# Altium PCB MASTER.PcbDoc
Units mm, origin at the board's own origin, x right, y up, seen from the top; angles counter-clockwise.
Board outline 91.49 x 74.39 mm, 2 copper layers (Top Layer, Bottom Layer); 49 components, 39 nets, 255 pads, 49 vias.
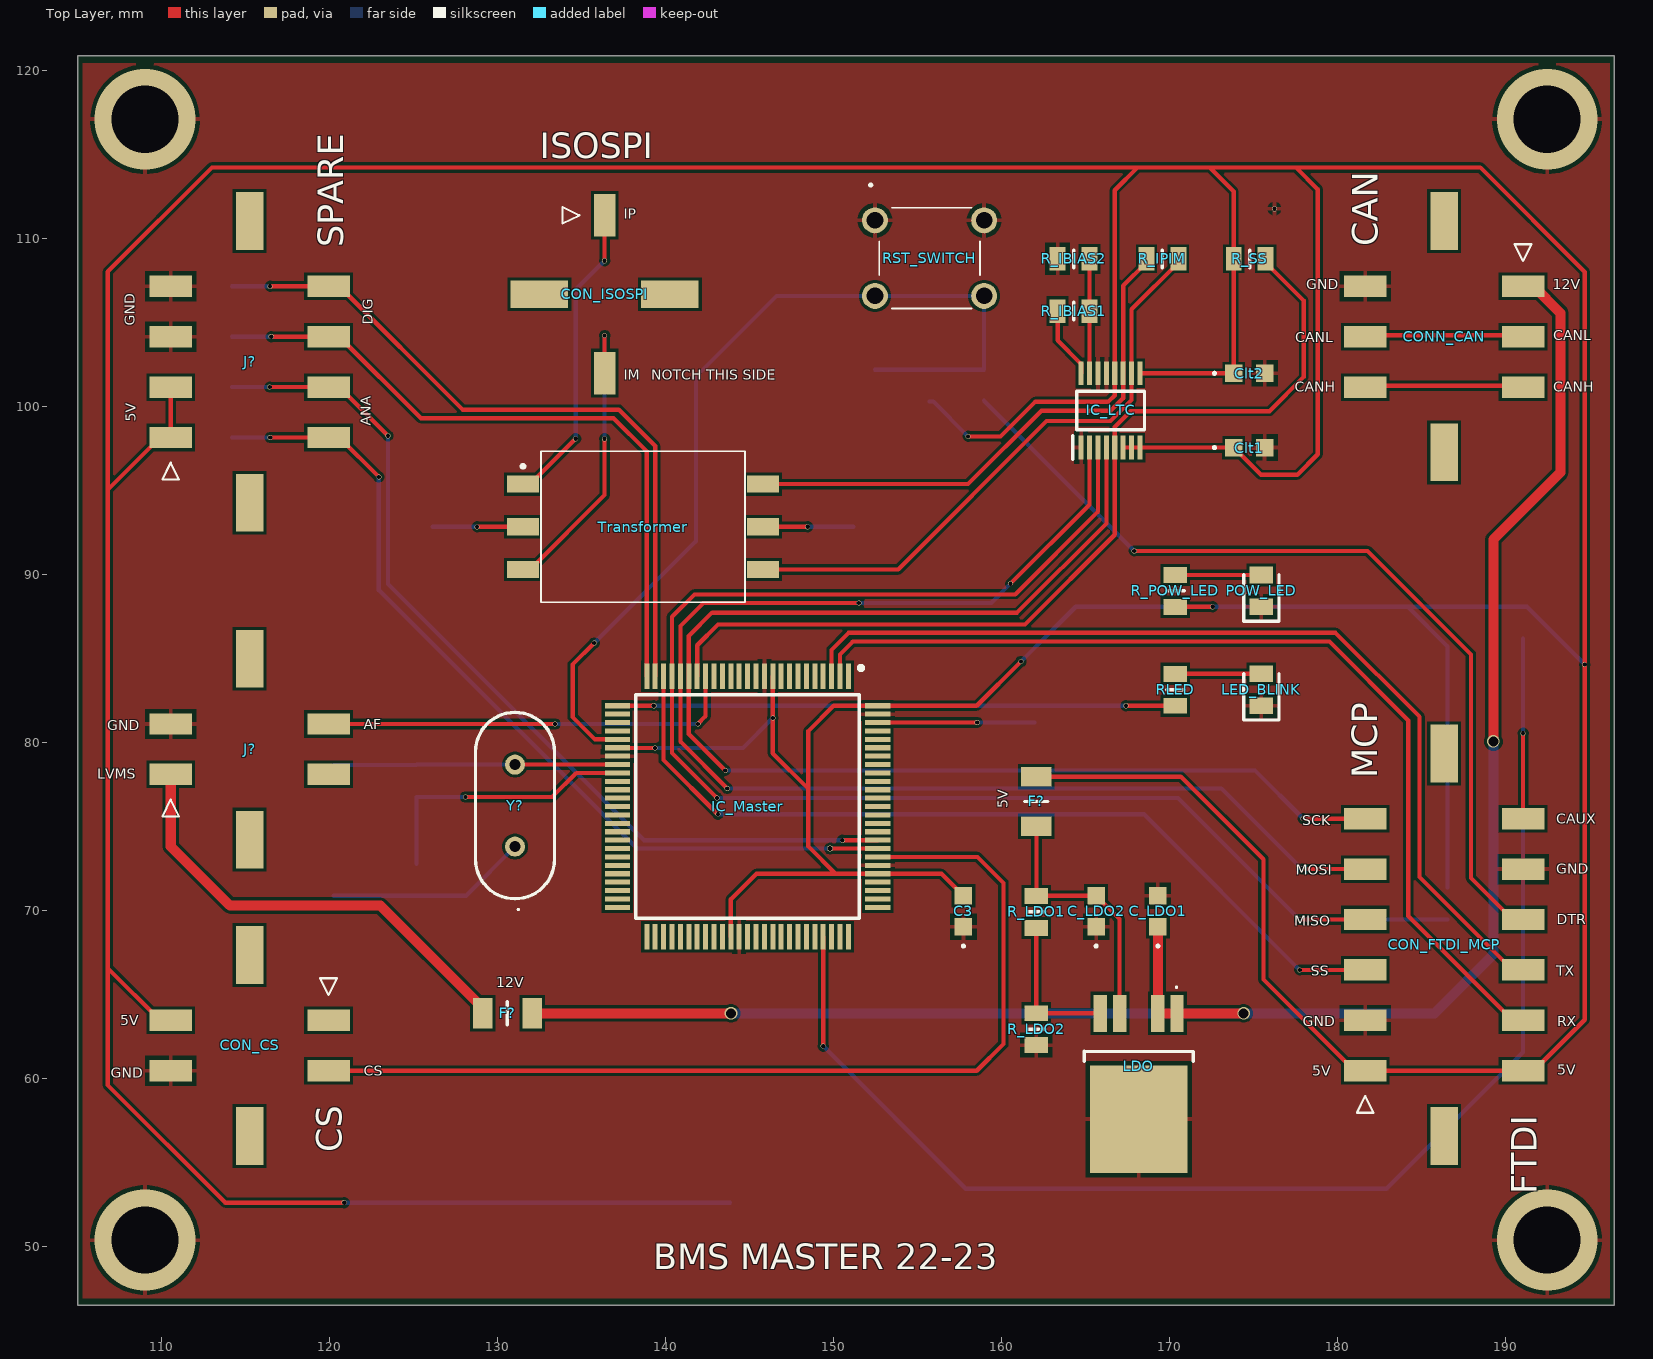
[diagram p0: Top Layer view]
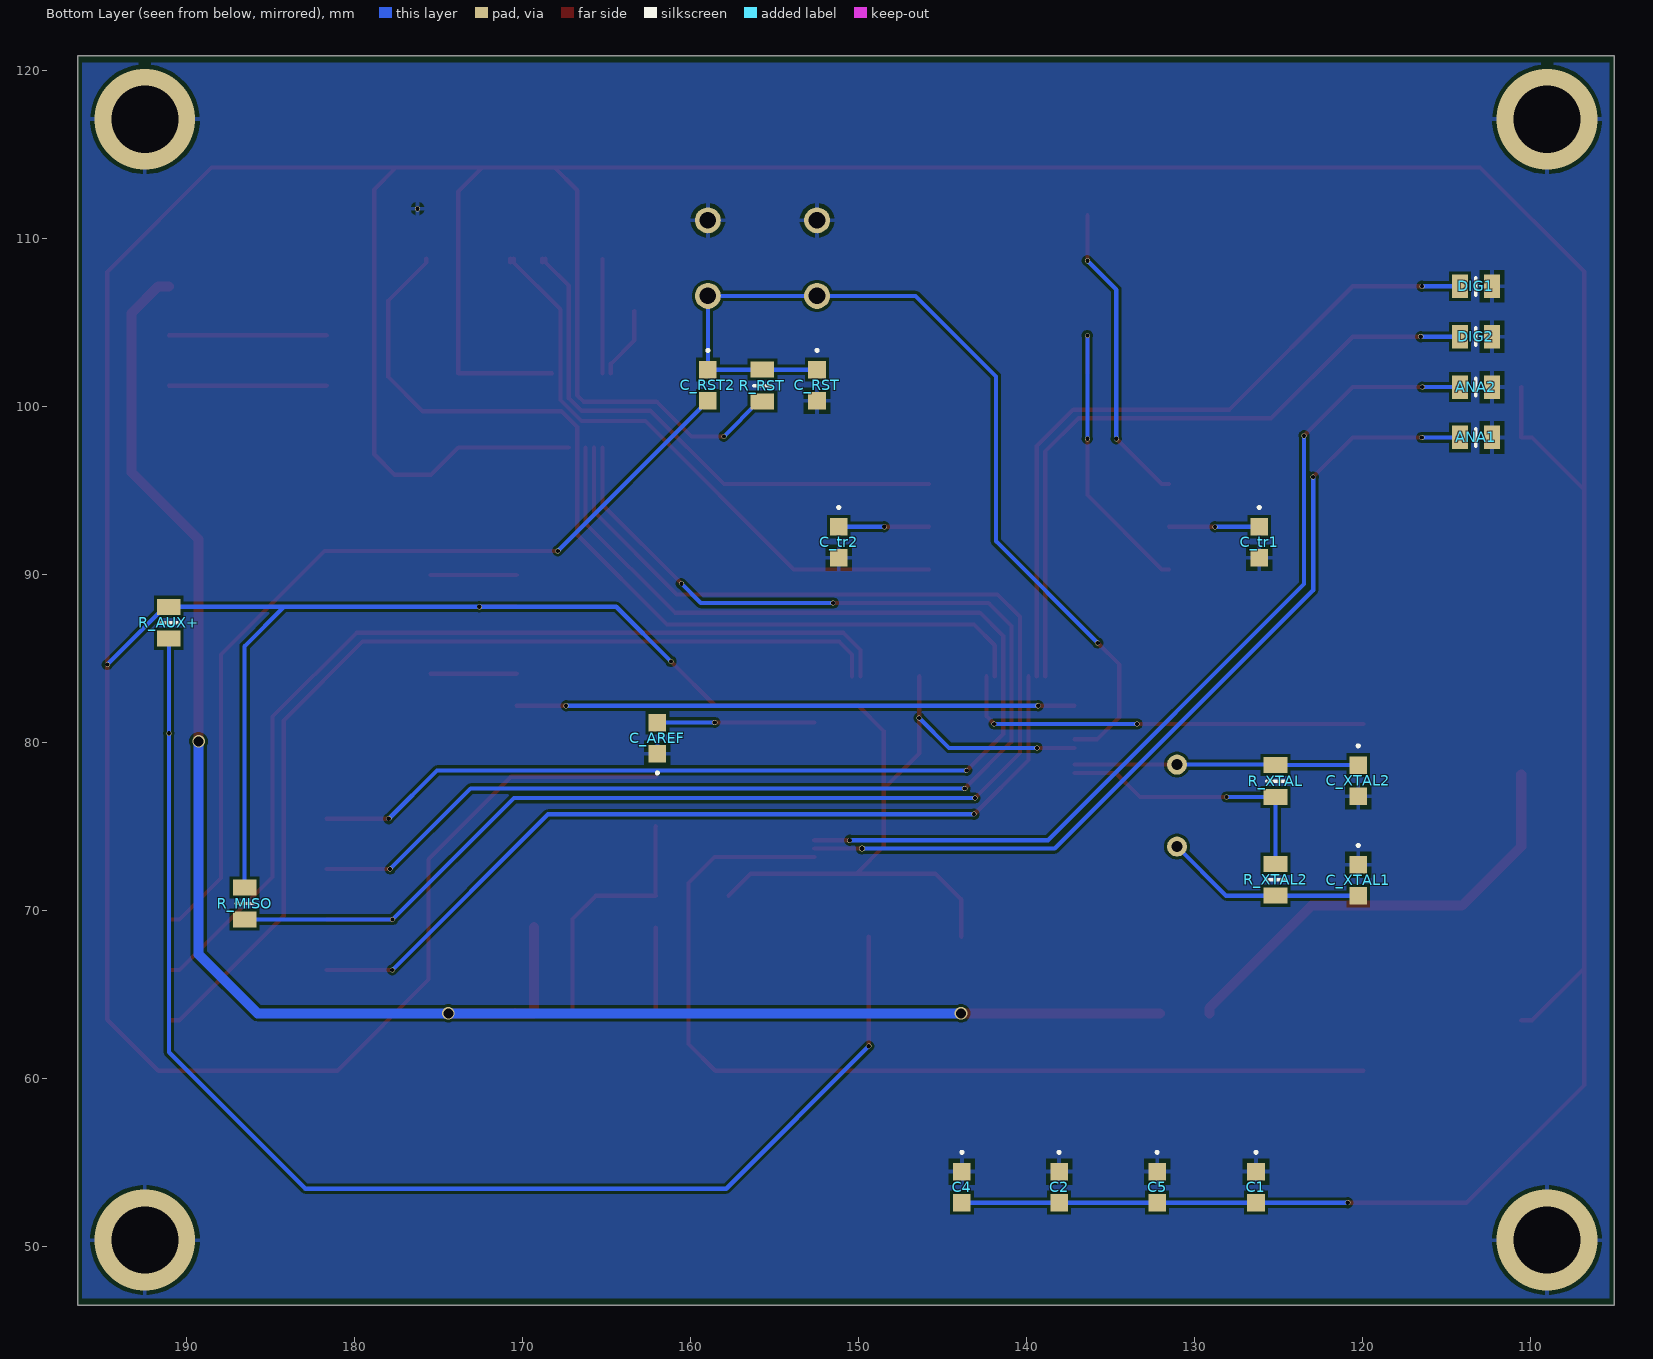
[diagram p1: Bottom Layer view, seen from below]
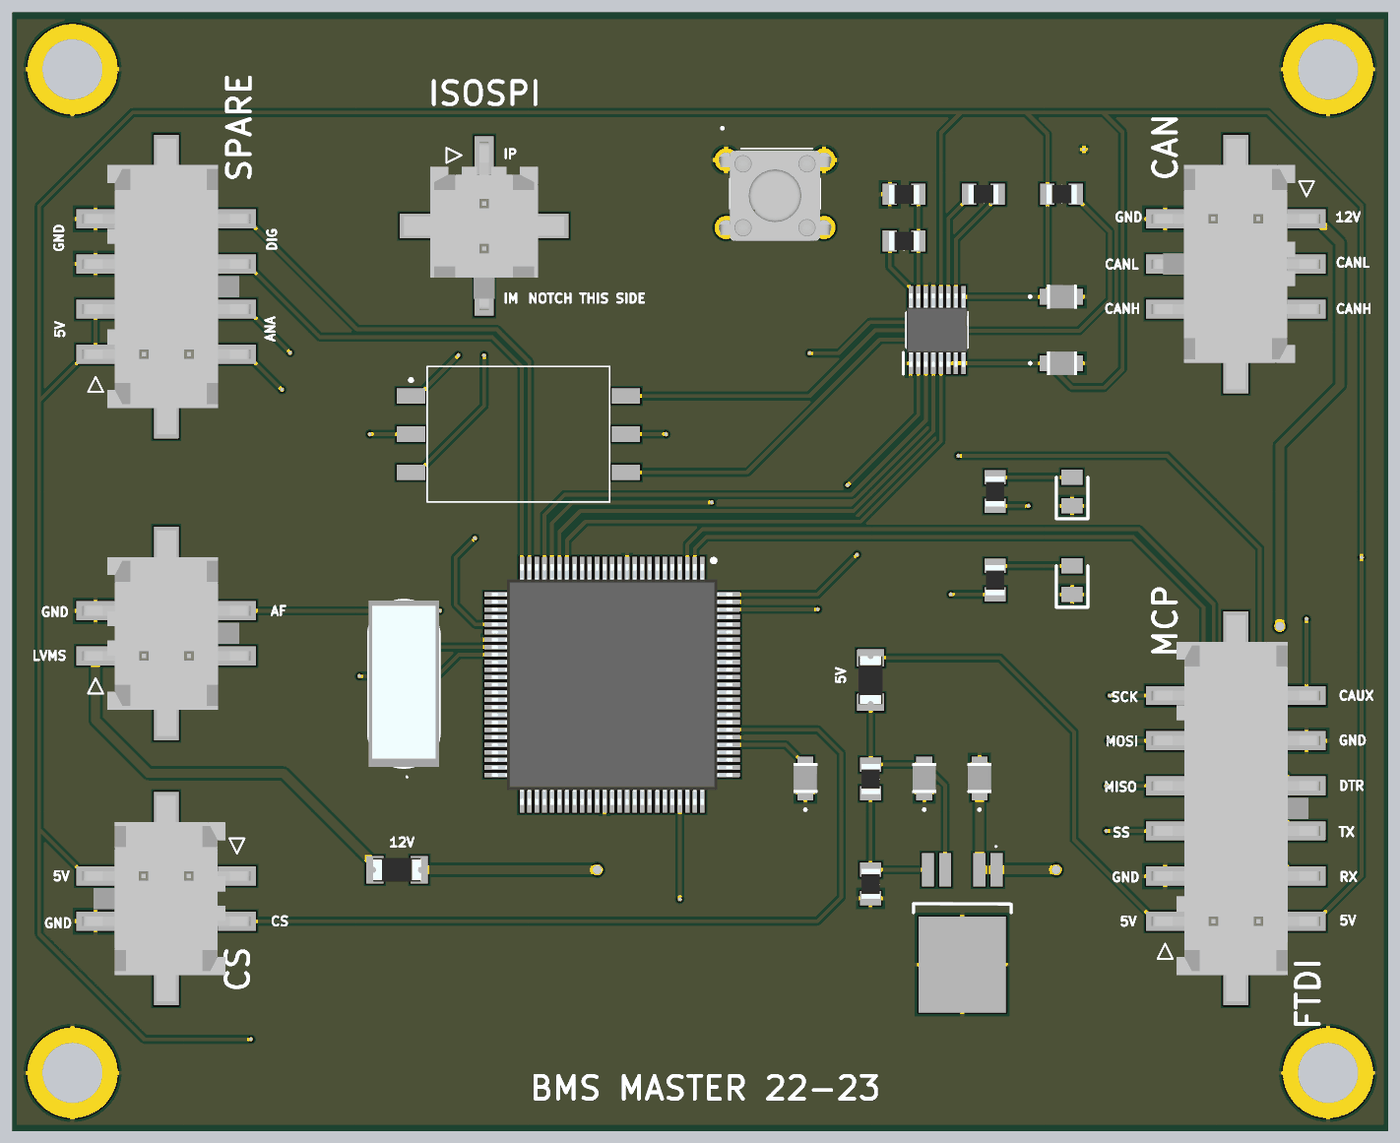
[diagram p2: 3D render of the assembled board from above, using the file's embedded part models]
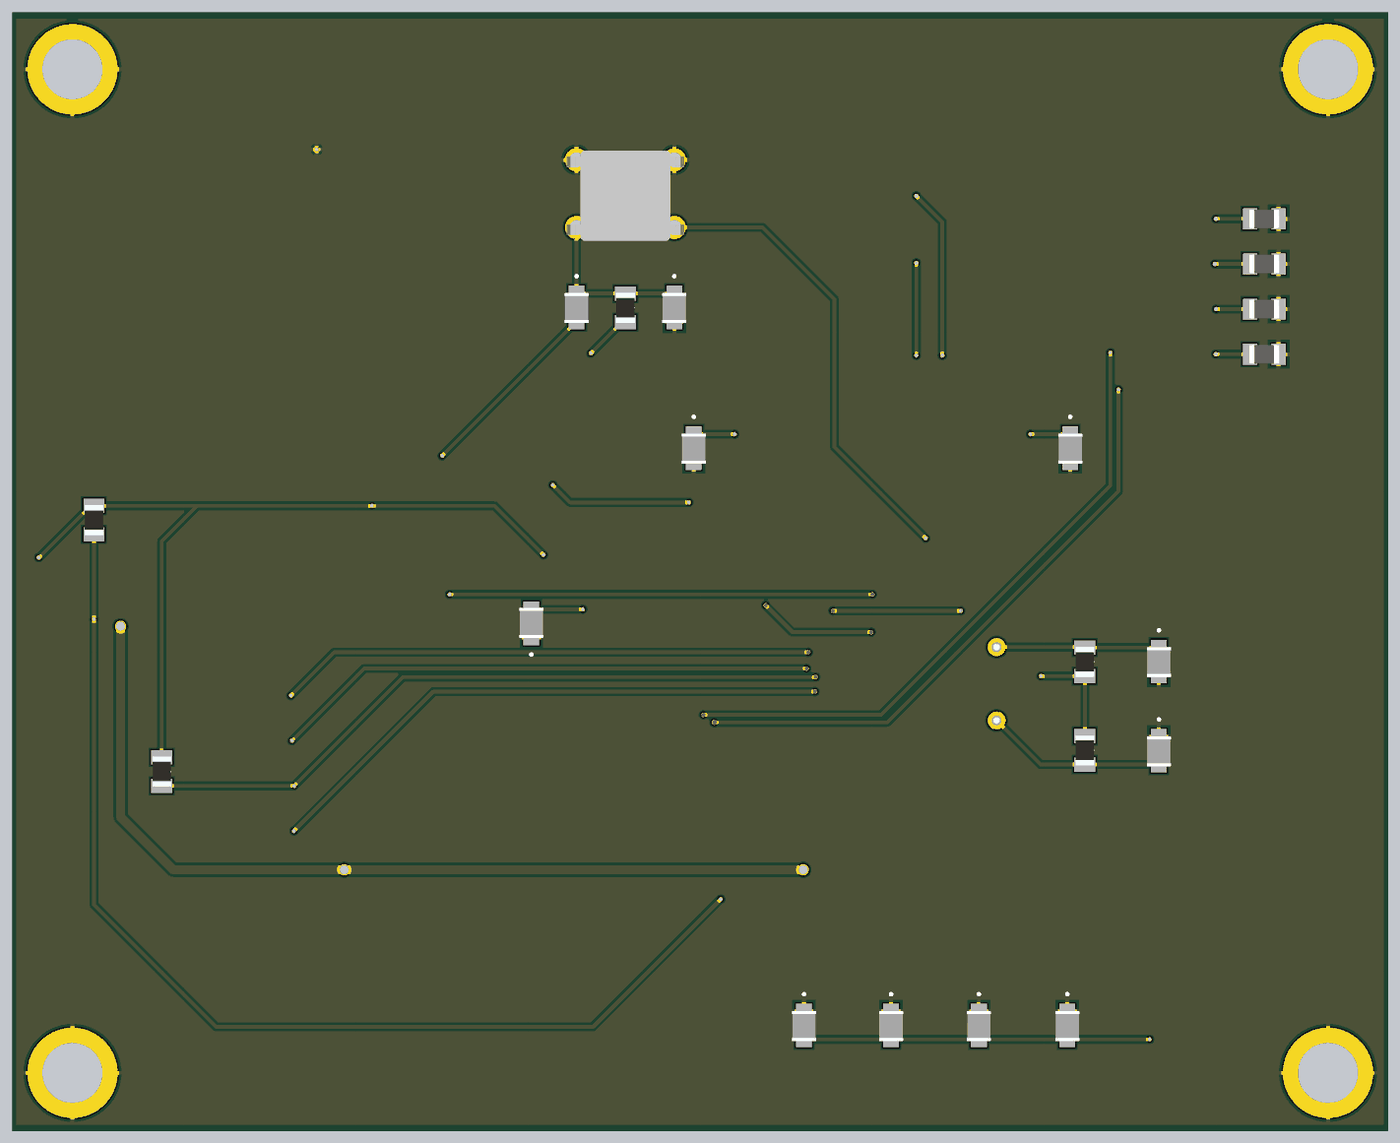
[diagram p3: 3D render of the assembled board from below, using the file's embedded part models]

## Layer stack, top to bottom
Top Solder: solder mask 0.0102, Solder Resist, Dk 3.5
Top Layer: signal copper 0.0356
Dielectric 1: dielectric 0.32, FR-4, Dk 4.8
Bottom Layer: signal copper 0.0356
Bottom Solder: solder mask 0.0102, Solder Resist, Dk 3.5

## Board outline
105.025,46.496 196.51,46.496 196.51,120.887 105.025,120.887

## Design rules (kind name [scope] priority, off if disabled: settings)
Clearance [All] p1: gap=0.17 ignorepadtopadclearanceinfootprint=FALSE
PolygonConnect [All] p1: connectstyle=Relief reliefconductorwidth=0.254 reliefentries=4 polygonreliefangle="90 Angle" airgapwidth=0.254
RoutingVias [All] p1: holewidth=0.25 width=0.3 viastyle="Through Hole" minholewidth=0.25 minwidth=0.3 maxholewidth=0.25 maxwidth=0.3
SolderMaskExpansion [All] p1: expansion=0.102 istentingtop=FALSE
Width [All] p1: maxlimit=0.6 minlimit=0.25 preferedwidth=0.25 minimp=50.000000 maximp=50.000000 favimp=50.000000
30 further rules are at their usual default settings.

## Components (designator, comment, footprint, x,y, rotation, side; value= is the part's Value field where it differs from the comment)
ANA1 "10K" RESC2012X60N 113.269,98.153 r0 bottom
ANA2 "10K" RESC2012X60N 113.269,101.153 r0 bottom
C1 "0.1uF" C2012_Commercial 126.362,53.528 r270 bottom
C2 "0.1uF" C2012_Commercial 138.082,53.528 r270 bottom
C3 "0.1uF" C2012_Commercial 157.757,69.949 r90 top
C4 "0.1uF" C2012_Commercial 143.869,53.528 r270 bottom
C5 "0.1uF" C2012_Commercial 132.244,53.528 r270 bottom
C_AREF "10nF" C2012_Commercial 161.996,80.257 r90 bottom
C_LDO1 "10nF" C2012_Commercial 169.331,69.949 r90 top
C_LDO2 "10nF" C2012_Commercial 165.66,69.949 r90 top
C_RST "22pF" C2012_Commercial 152.49,101.265 r270 bottom
C_RST2 "10uF" C2012_Commercial 158.99,101.265 r270 bottom
C_tr1 "0.01uF" C2012_Commercial 126.168,91.916 r270 bottom
C_tr2 "0.01uF" C2012_Commercial 151.199,91.916 r270 bottom
C_XTAL1 "22pF" C2012_Commercial 120.275,71.795 r270 bottom
C_XTAL2 "22pF" C2012_Commercial 120.275,77.725 r270 bottom
Clt1 "0.01uF" C2012_Commercial 174.775,97.552 r0 top
Clt2 "0.01uF" C2012_Commercial 174.775,101.976 r0 top
CON_CS "43045-0419" 43045-04YY_181920 115.269,61.959 r90 top
CON_FTDI_MCP "43045-1219" 43045-12YY_181920 186.376,67.959 r270 top
CON_ISOSPI "43045-0218" 43045-02YY_181920 136.398,106.681 r180 top
CONN_CAN "43045-0619" 43045-06YY_181920 186.376,104.153 r90 top
DIG1 "10K" RESC2012X60N 113.269,107.153 r0 bottom
DIG2 "10K" RESC2012X60N 113.269,104.153 r0 bottom
F? "NANOSMDC020F-2" NANOSMDC016F2 162.095,76.487 r90 top
F? "NANOSMDC020F-2" NANOSMDC016F2 130.61,63.876 r180 top
IC_LTC "LTC6820IMS#PBF" SOP50P490X110-16N 166.517,99.764 r90 top
IC_Master "ATMEGA2560-16AU" QFP50P1600X1600X120-100N 144.91,76.184 r270 top
J? "43045-0819" 43045-08YY_181920 115.269,102.653 r270 top
J? "43045-0419" 43045-04YY_181920 115.269,79.597 r270 top
LDO "TLF1963TEATMA1" TLF1963TEATMA1 168.191,59.626 r180 top
LED_BLINK "SML-LXT0805IW-TR" LEDC2012X80N 175.49,83.134 r90 top
POW_LED "SML-LXT0805IW-TR" LEDC2012X80N 175.49,89.024 r90 top
R_AUX+ "10k" RESC2012X60N 191.076,87.124 r90 bottom
R_IBIAS1 "2.8K" RESC2012X60N 164.317,105.682 r0 top
R_IBIAS2 "1.2K" RESC2012X60N 164.317,108.782 r0 top
R_IPIM "120" RESC2012X60N 169.6,108.792 r0 top
R_LDO1 "3.3K" RESC2012X60N 162.095,69.913 r90 top
R_LDO2 "10K" RESC2012X60N 162.095,62.928 r90 top
R_MISO "2K" RESC2012X60N 186.568,70.409 r90 bottom
R_POW_LED "1K" RESC2012X60N 170.373,89.024 r90 top
R_RST "10k" RESC2012X60N 155.74,101.241 r270 bottom
R_SS "10K" RESC2012X60N 174.8,108.792 r180 top
R_XTAL "1M" RESC2012X60N 125.2,77.7 r270 bottom
R_XTAL2 "27" RESC2012X60N 125.2,71.825 r90 bottom
RLED "1K" RESC2012X60N 170.373,83.134 r90 top
RST_SWITCH "1825910-3" 18259103 152.49,111.08 r90 top
Transformer "HM2113ZNL" HM2113ZNL 138.684,92.837 r270 top
Y? "LFXTAL003169" LFXTAL003169 131.064,73.801 r90 top

## Footprints (in the part's own frame and the unit in brackets; to place one, negate y for a bottom-side part, rotate by r counter-clockwise, add the part's x,y. Pads: shape width x height; smd on the part's side, far side on the other; paste and mask are expansions set on the pad)
43045-02YY_181920 [mm]
  rect 1.27x2.54 smd: 1(0,-4.7) 2(0,4.7)
  rect 3.43x1.65 smd: 3(3.885,0) 4(-3.885,0)
  silkscreen extent 1.5,-5.2 2.5,-4.2, body extent -5.33,-5.6 5.33,5.6, height 9.96
43045-04YY_181920 [mm]
  rect 1.27x2.54 smd: 1(1.5,-4.7) 2(-1.5,-4.7) 3(1.5,4.7) 4(-1.5,4.7)
  rect 3.43x1.65 smd: 5(5.385,0) 6(-5.385,0)
  silkscreen extent 3,-5.2 4,-4.2, body extent -6.83,-5.6 6.83,5.6, height 9.96
43045-06YY_181920 [mm]
  rect 1.27x2.54 smd: 1(3,-4.7) 2(0,-4.7) 3(-3,-4.7) 4(3,4.7) 5(0,4.7) 6(-3,4.7)
  rect 3.43x1.65 smd: 7(6.885,0) 8(-6.885,0)
  silkscreen extent 4.5,-5.2 5.5,-4.2, body extent -8.32,-5.6 8.32,5.6, height 9.96
43045-08YY_181920 [mm]
  rect 1.27x2.54 smd: 1(4.5,-4.7) 2(1.5,-4.7) 3(-1.5,-4.7) 4(-4.5,-4.7) 5(4.5,4.7) 6(1.5,4.7) 7(-1.5,4.7) 8(-4.5,4.7)
  rect 3.43x1.65 smd: 9(8.385,0) 10(-8.385,0)
  silkscreen extent 6,-5.2 7,-4.2, body extent -9.82,-5.6 9.82,5.6, height 9.96
43045-12YY_181920 [mm]
  rect 1.27x2.54 smd: 1(7.5,-4.7) 2(4.5,-4.7) 3(1.5,-4.7) 4(-1.5,-4.7) 5(-4.5,-4.7) 6(-7.5,-4.7) 7(7.5,4.7) 8(4.5,4.7) 9(1.5,4.7) 10(-1.5,4.7) 11(-4.5,4.7) 12(-7.5,4.7)
  rect 3.43x1.65 smd: 13(11.385,0) 14(-11.385,0)
  silkscreen extent 9,-5.2 10,-4.2, body extent -12.83,-5.6 12.83,5.6, height 9.95
18259103 [mm]
  round 1.54 hole 0.99: 1(0,0) 2(0,-6.5) 3(-4.5,0) 4(-4.5,-6.5)
  silkscreen extent -5.25,-6.25 2.15,0.3, body extent -5.39,-7.15 0.61,0.65, height 3.32
C2012_Commercial [mm]
  rect 1.05x1.05 smd: 1(-0.925,0) 2(0.925,0)
  silkscreen extent -2.12,-0.05 -2.03,0.05, body extent -0.96,-0.8 1.04,0.8, height 1.25
HM2113ZNL [mm]
  rect 1.02x1.89 smd: 1(-2.54,-7.145) 2(0,-7.145) 3(2.54,-7.145) 4(2.54,7.145) 5(0,7.145) 6(-2.54,7.145)
  silkscreen extent -4.5,-7.24 4.5,6.08
LEDC2012X80N [mm]
  rect 1x1.4 smd: 1(-0.95,0) 2(0.95,0)
  silkscreen extent -1.8,-1.05 0.95,1.05
LFXTAL003169 [mm]
  round 1.192 hole 0.65: 1(0,0) 2(4.88,0)
  silkscreen extent -3.8,-2.35 7.99,2.35, body extent -3.09,-2.35 7.97,2.35, height 4.1
NANOSMDC016F2 [mm]
  rect 1.16x1.81 smd: 1(-1.475,0) 2(1.475,0)
  silkscreen extent 0,-0.69 0,0.69, body extent -1.6,-0.79 1.6,0.79, height 0.82
QFP50P1600X1600X120-100N [mm]
  rect 1.5x0.3 smd: 1(-7.75,6) 2(-7.75,5.5) 3(-7.75,5) 4(-7.75,4.5) 5(-7.75,4) 6(-7.75,3.5) 7(-7.75,3) 8(-7.75,2.5) 9(-7.75,2) 10(-7.75,1.5) 11(-7.75,1) 12(-7.75,0.5) 13(-7.75,0) 14(-7.75,-0.5) 15(-7.75,-1) 16(-7.75,-1.5) 17(-7.75,-2) 18(-7.75,-2.5) 19(-7.75,-3) 20(-7.75,-3.5) 21(-7.75,-4) 22(-7.75,-4.5) 23(-7.75,-5) 24(-7.75,-5.5) 25(-7.75,-6) 51(7.75,-6) 52(7.75,-5.5) 53(7.75,-5) 54(7.75,-4.5) 55(7.75,-4) 56(7.75,-3.5) 57(7.75,-3) 58(7.75,-2.5) 59(7.75,-2) 60(7.75,-1.5) 61(7.75,-1) 62(7.75,-0.5) 63(7.75,0) 64(7.75,0.5) 65(7.75,1) 66(7.75,1.5) 67(7.75,2) 68(7.75,2.5) 69(7.75,3) 70(7.75,3.5) 71(7.75,4) 72(7.75,4.5) 73(7.75,5) 74(7.75,5.5) 75(7.75,6)
  rect 0.3x1.5 smd: 26(-6,-7.75) 27(-5.5,-7.75) 28(-5,-7.75) 29(-4.5,-7.75) 30(-4,-7.75) 31(-3.5,-7.75) 32(-3,-7.75) 33(-2.5,-7.75) 34(-2,-7.75) 35(-1.5,-7.75) 36(-1,-7.75) 37(-0.5,-7.75) 38(0,-7.75) 39(0.5,-7.75) 40(1,-7.75) 41(1.5,-7.75) 42(2,-7.75) 43(2.5,-7.75) 44(3,-7.75) 45(3.5,-7.75) 46(4,-7.75) 47(4.5,-7.75) 48(5,-7.75) 49(5.5,-7.75) 50(6,-7.75) 76(6,7.75) 77(5.5,7.75) 78(5,7.75) 79(4.5,7.75) 80(4,7.75) 81(3.5,7.75) 82(3,7.75) 83(2.5,7.75) 84(2,7.75) 85(1.5,7.75) 86(1,7.75) 87(0.5,7.75) 88(0,7.75) 89(-0.5,7.75) 90(-1,7.75) 91(-1.5,7.75) 92(-2,7.75) 93(-2.5,7.75) 94(-3,7.75) 95(-3.5,7.75) 96(-4,7.75) 97(-4.5,7.75) 98(-5,7.75) 99(-5.5,7.75) 100(-6,7.75)
  silkscreen extent -8.37,-6.65 6.65,6.88, body extent -8,-8 8,8, height 1.2
RESC2012X60N [mm]
  rect 0.95x1.4 smd: 1(-0.95,0) 2(0.95,0)
  silkscreen extent 0,-0.53 0,0.53, body extent -1,-0.63 1,0.63, height 0.6
SOP50P490X110-16N [mm]
  rect 1.425x0.3 smd: 1(-2.212,1.75) 2(-2.212,1.25) 3(-2.212,0.75) 4(-2.212,0.25) 5(-2.212,-0.25) 6(-2.212,-0.75) 7(-2.212,-1.25) 8(-2.212,-1.75) 9(2.212,-1.75) 10(2.212,-1.25) 11(2.212,-0.75) 12(2.212,-0.25) 13(2.212,0.25) 14(2.212,0.75) 15(2.212,1.25) 16(2.212,1.75)
  silkscreen extent -2.93,-2.02 1.15,2.25, body extent -2.45,-2.02 2.45,2.02, height 1.1
TLF1963TEATMA1 [mm]
  rect 0.8x2.2 smd: 1(-2.28,-4.25) 2(-1.14,-4.25) 4(1.14,-4.25) 5(2.28,-4.25)
  rect 5.8x6.4 smd: 3(0,2.05)
  silkscreen extent -3.25,-5.85 3.25,-1.4

## Part data
ANA1 ANA2 DIG1 DIG2: library part RC0805JR-0710KL, "Resistor", Manufacturer_Name=YAGEO, Mouser Part Number=603-RC0805JR-0710KL, Arrow Part Number=RC0805JR-0710KL, Arrow Price/Stock=https://www.arrow.com/en/products/rc0805jr-0710kl/yageo?region=nac, Datasheet Link=https://componentsearchengine.com/Datasheets/2/RC0805JR-0710KL.pdf, Height=0.6mm, Manufacturer_Part_Number=RC0805JR-0710KL, Mouser Price/Stock=https://www.mouser.co.uk/ProductDetail/YAGEO/RC0805JR-0710KL?qs=ZFGQJeMQzF5q%2Fp77vM%2FrVQ%3D%3D
C1 C2 C3 C4 C5 C_AREF C_LDO1 C_LDO2 C_RST C_RST2 C_tr1 C_tr2 C_XTAL1 C_XTAL2 Clt1 Clt2: library part C2012C0G1E333J125AA, "Capacitor", Manufacturer_Name=TDK, Mouser Part Number=810-C2012C0G1E333J, Arrow Part Number=C2012C0G1E333J125AA, Arrow Price/Stock=https://www.arrow.com/en/products/c2012c0g1e333j125aa/tdk, Datasheet Link=https://product.tdk.com/system/files/dam/doc/product/capacitor/ceramic/mlcc/catalog/mlcc_commercial_general_en.pdf, Height=0.75mm, Manufacturer_Part_Number=C2012C0G1E333J125AA, Mouser Price/Stock=https://www.mouser.co.uk/ProductDetail/TDK/C2012C0G1E333J125AA?qs=NRhsANhppD9YN6415mAquQ%3D%3D
CON_CS J?: "Connector", Manufacturer_Name=Molex, Mouser Part Number=538-43045-0419, Datasheet Link=https://www.molex.com/pdm_docs/sd/430450218_sd.pdf, Height=9.91mm, Manufacturer_Part_Number=43045-0419, Mouser Price/Stock=https://www.mouser.co.uk/ProductDetail/Molex/43045-0419?qs=UeCeOHRHQebVNIQyI9VWWg%3D%3D
CON_FTDI_MCP: "Connector", Manufacturer_Name=Molex, Mouser Part Number=538-43045-1219, Datasheet Link=https://www.molex.com/pdm_docs/sd/430450218_sd.pdf, Height=9.91mm, Manufacturer_Part_Number=43045-1219, Mouser Price/Stock=https://www.mouser.co.uk/ProductDetail/Molex/43045-1219?qs=359VwiUTsp3iCU2NVYxNVg%3D%3D
CON_ISOSPI: "Connector", Manufacturer_Name=Molex, Mouser Part Number=538-43045-0218, Arrow Part Number=43045-0218, Arrow Price/Stock=https://www.arrow.com/en/products/43045-0218/molex, Datasheet Link=https://www.molex.com/pdm_docs/sd/430450218_sd.pdf, Height=9.91mm, Manufacturer_Part_Number=43045-0218, Mouser Price/Stock=https://www.mouser.co.uk/ProductDetail/Molex/43045-0218?qs=4XSMV6Twtb2qUKINalLbdA%3D%3D
CONN_CAN: "Connector", Manufacturer_Name=Molex, Mouser Part Number=538-43045-0619, Arrow Part Number=43045-0619, Arrow Price/Stock=https://www.arrow.com/en/products/43045-0619/molex, Datasheet Link=https://www.molex.com/pdm_docs/sd/430450218_sd.pdf, Height=9.91mm, Manufacturer_Part_Number=43045-0619, Mouser Price/Stock=https://www.mouser.co.uk/ProductDetail/Molex/43045-0619?qs=KC2ywxza1kr7EVu5MuTw7g%3D%3D
F? F?: "Resettable Fuse", Manufacturer_Name=LITTELFUSE, Mouser Part Number=650-NANOSMDC020F-2, Arrow Part Number=NANOSMDC020F-2, Arrow Price/Stock=https://www.arrow.com/en/products/nanosmdc020f-2/littelfuse, Datasheet Link=https://www.littelfuse.com/~/media/electronics/datasheets/resettable_ptcs/littelfuse_ptc_nanosmdc_datasheet.pdf.pdf, Height=1mm, Manufacturer_Part_Number=NANOSMDC020F-2, Mouser Price/Stock=https://www.mouser.co.uk/ProductDetail/Littelfuse/NANOSMDC020F-2?qs=iK0evp%252BCRRU6agwMt7HYjg%3D%3D
IC_LTC: "Integrated Circuit", Manufacturer_Name="Analog Devices", Mouser Part Number=584-LTC6820IMS#PBF, Arrow Part Number=LTC6820IMS#PBF, Arrow Price/Stock=https://www.arrow.com/en/products/ltc6820imspbf/linear-technology, Datasheet Link=https://datasheet.datasheetarchive.com/originals/distributors/Datasheets-SFU1/DSASFU10008504.pdf, Height=1.1mm, Manufacturer_Part_Number=LTC6820IMS#PBF, Mouser Price/Stock=https://www.mouser.co.uk/ProductDetail/Analog-Devices/LTC6820IMSPBF?qs=hVkxg5c3xu9mQWZApkXW1Q%3D%3D
IC_Master: "Integrated Circuit", Manufacturer_Name=Microchip, Mouser Part Number=556-ATMEGA2560-16AU, Arrow Part Number=ATMEGA2560-16AU, Arrow Price/Stock=https://www.arrow.com/en/products/atmega2560-16au/microchip-technology?region=nac, Datasheet Link=https://datasheet.datasheetarchive.com/originals/distributors/Datasheets_SAMA/4a5a397fa76c39b5297f4121ace1d84e.pdf, Height=1.2mm, Manufacturer_Part_Number=ATMEGA2560-16AU, Mouser Price/Stock=https://www.mouser.co.uk/ProductDetail/Microchip-Technology-Atmel/ATMEGA2560-16AU?qs=aqrrBurbvGciYmlAokFS0w%3D%3D
J?: "Connector", Manufacturer_Name=Molex, Mouser Part Number=538-43045-0819, Arrow Part Number=43045-0819, Arrow Price/Stock=https://www.arrow.com/en/products/43045-0819/molex?region=nac, Datasheet Link=https://www.molex.com/pdm_docs/sd/430450218_sd.pdf, Height=9.91mm, Manufacturer_Part_Number=43045-0819, Mouser Price/Stock=https://www.mouser.co.uk/ProductDetail/Molex/43045-0819?qs=6RXNyJqNVR7Wg0o6pQawlw%3D%3D
LDO: "Integrated Circuit", Manufacturer_Name=Infineon, Mouser Part Number=726-TLF1963TEATMA1, Arrow Part Number=TLF1963TEATMA1, Arrow Price/Stock=https://www.arrow.com/en/products/tlf1963teatma1/infineon-technologies-ag?region=nac, Datasheet Link=https://www.infineon.com/dgdl/Infineon-TLF1963-DS-v01_00-EN.pdf?fileId=5546d46258fc0bc1015969d2981941e0, Height=2.35mm, Manufacturer_Part_Number=TLF1963TEATMA1, Mouser Price/Stock=https://www.mouser.co.uk/ProductDetail/Infineon-Technologies/TLF1963TEATMA1?qs=SiyfpgnvCZluIGE%2FbZiglw%3D%3D
LED_BLINK POW_LED: "LED", Manufacturer_Name=Lumex, Mouser Part Number=696-SML-LXT0805IW, Arrow Part Number=SML-LXT0805IW-TR, Arrow Price/Stock=https://www.arrow.com/en/products/sml-lxt0805iw-tr/lumex, Datasheet Link=http://uk.rs-online.com/web/p/products/8886313, Height=0.8mm, Manufacturer_Part_Number=SML-LXT0805IW-TR, Mouser Price/Stock=https://www.mouser.co.uk/ProductDetail/Lumex/SML-LXT0805IW-TR?qs=9HInCHf8eFgASaxWaq368w%3D%3D
R_AUX+ R_IBIAS1 R_IBIAS2 R_IPIM R_LDO1 R_LDO2 R_MISO R_POW_LED R_RST R_SS R_XTAL R_XTAL2 RLED: library part RC0805JR-0710KL, "Resistor", Manufacturer_Name=KEMET, Mouser Part Number=603-RC0805JR-0710KL, Arrow Part Number=RC0805JR-0710KL, Arrow Price/Stock=https://www.arrow.com/en/products/rc0805jr-0710kl/yageo, Height=0.6mm, Manufacturer_Part_Number=RC0805JR-0710KL, Mouser Price/Stock=https://www.mouser.co.uk/ProductDetail/YAGEO/RC0805JR-0710KL?qs=ZFGQJeMQzF5q%2Fp77vM%2FrVQ%3D%3D
  R_AUX+ R_IBIAS1 R_IBIAS2 R_IPIM R_LDO1 R_LDO2 R_POW_LED R_RST R_XTAL R_XTAL2 RLED: Datasheet Link=https://datasheet.datasheetarchive.com/originals/distributors/Datasheets_SAMA/902f9e387b938f871d31120f5fc1d65e.pdf
  R_MISO R_SS: Datasheet Link=http://www.yageo.com/documents/recent/PYu-RC_Group_51_RoHS_L_10.pdf
RST_SWITCH: "Switch", Manufacturer_Name="TE Connectivity", Mouser Part Number=N/A, Arrow Part Number=1825910-3, Arrow Price/Stock=https://www.arrow.com/en/products/1825910-3/te-connectivity?region=nac, Datasheet Link=http://uk.rs-online.com/web/p/products/4791407, Height=4.3mm, Manufacturer_Part_Number=1825910-3, Mouser Price/Stock=https://www.mouser.co.uk/ProductDetail/TE-Connectivity/1825910-3?qs=bdENzIhz2rnPyBgKfIxERA%3D%3D
Transformer: "Transformer", Manufacturer_Name=Pulse, Mouser Part Number=673-HM2113ZNL, Arrow Part Number=HM2113ZNL, Arrow Price/Stock=https://www.arrow.com/en/products/hm2113znl/pulse-electronics-corporation?region=nac, Datasheet Link=https://www.mouser.com/datasheet/2/336/HM2113ZNL-1224943.pdf, Height=3.45mm, Manufacturer_Part_Number=HM2113ZNL, Mouser Price/Stock=https://www.mouser.co.uk/ProductDetail/Pulse-Electronics/HM2113ZNL?qs=chTDxNqvsykAwD5fAZXknQ%3D%3D
Y?: "Crystal or Oscillator", Manufacturer_Name=IQD, Datasheet Link=https://componentsearchengine.com/Datasheets/2/LFXTAL003169.pdf, Height=4.1mm, Manufacturer_Part_Number=LFXTAL003169

## Via types
v1: diameter 0.3, hole 0.25, Top Layer to Bottom Layer, 41 vias
v2: diameter 6, hole 4, Top Layer to Bottom Layer, 4 vias
v3: diameter 0.75, hole 0.6, Top Layer to Bottom Layer, 3 vias
v4: diameter 0.35, hole 0.3, Top Layer to Bottom Layer, 1 vias

## Nets (pads, with @x,y where several pads share a name; then routed paths per layer and width w, separated by ;. In a path a pad name is that pad's centre, name@x,y a point inside that pad or via, vN(x,y) a via of type N, cw(c..) or ccw(c..) an arc to the next point about the centre after c; other vN are vias at no path point)
5V: C_LDO2.2 F?.1@162.095,75.012 LDO.4 R_LDO1.2 | length 15.3
  Top Layer w0.25: R_LDO1.2 R_LDO1.2@162.106,70.874 ; F?.1@162.095,75.012 162.106,75.001 R_LDO1.2@162.106,70.874 ; LDO.4 167.051,69.483 C_LDO2.2 R_LDO1.2@162.106,70.874
+5: C1.2 C2.2 C3.2 C4.2 C5.2 Clt1.1 Clt2.1 CON_CS.3 CON_FTDI_MCP.1 CON_FTDI_MCP.7 F?.2@162.095,77.962 IC_LTC.6 IC_LTC.7 IC_LTC.8 IC_LTC.9 IC_LTC.12 IC_Master.10 IC_Master.31 IC_Master.61 IC_Master.80 IC_Master.100 J?.1@110.569,98.153 J?.2@110.569,101.153 R_AUX+.2 R_MISO.2 R_POW_LED.1 R_RST.2 R_SS.2 | length 474.8
  Top Layer w0.25: CON_CS.3 109.934,63.459 106.816,66.577 ; J?.2@110.569,101.153 110.569,98.153 109.934,98.153 106.816,95.035 ; v1(120.896,52.603) 113.814,52.603 106.816,59.601 106.816,66.577 ; IC_Master.31@137.169,79.675 v1(139.4,79.675) ; IC_Master.61@143.905,68.429 IC_Master.61 143.91,70.66 145.434,72.184 150.141,72.184 ; IC_Master.10 v1(146.41,81.456) 146.41,79.352 148.525,77.238 ; C3.2 156.447,72.184 IC_Master.80 150.141,72.184 ; v1(158.036,98.22) 159.973,98.22 162.037,100.284 166.399,100.284 166.767,100.652 IC_LTC.12 166.767,112.872 168.119,114.224 ; v1(161.187,84.819) 158.552,82.184 IC_Master.100 150.034,82.184 148.525,80.675 148.525,77.238 ; F?.2@162.095,77.962 170.698,77.962 175.617,73.043 175.617,65.883 181.041,60.459 CON_FTDI_MCP.1 CON_FTDI_MCP.7 191.711,60.459 194.741,63.489 194.741,108.012 188.529,114.224 177.554,114.224 ; IC_LTC.6 IC_LTC.7 IC_LTC.8 Clt1.1 175.466,95.936 177.635,95.936 178.852,97.153 178.852,112.926 177.554,114.224 ; IC_LTC.9 Clt2.1 R_SS.2 173.85,112.798 172.424,114.224 ; R_POW_LED.1 v1(172.594,88.074) ; 106.816,66.577 106.816,95.035 ; 106.816,95.035 106.816,108.02 113.02,114.224 168.119,114.224 ; 148.525,77.238 148.525,73.8 150.141,72.184 ; 168.119,114.224 172.424,114.224 ; 172.424,114.224 177.554,114.224
  Bottom Layer w0.25: v1(120.896,52.603) C1.2 C5.2 C2.2 C4.2 ; v1(139.4,79.675) 144.629,79.675 v1(146.41,81.456) ; R_RST.2 155.965,100.291 v1(158.036,98.22) ; v1(161.187,84.819) 164.442,88.074 v1(172.594,88.074) 184.215,88.074 ; R_MISO.2 186.568,85.721 184.215,88.074 ; v1(194.741,84.634) 191.301,88.074 R_AUX+.2 184.215,88.074
+12: C_LDO1.1 CONN_CAN.1 F?.1@132.085,63.876 LDO.1 LDO.2 | length 111.6
  Top Layer w0.6: F?.1@132.085,63.876 v3(143.92,63.876) ; C_LDO1.1 LDO.2 LDO.1 170.474,63.879 170.477,63.876 v3(174.435,63.876) ; v3(189.303,80.063) 189.303,92.084 193.294,96.075 193.294,105.57 191.711,107.153 CONN_CAN.1
  Bottom Layer w0.6: v3(143.92,63.876) v3(174.435,63.876) 185.805,63.876 189.303,67.374 v3(189.303,80.063)
AMS_FAULT: IC_Master.18 J?.4@119.969,81.097 | length 25
  Top Layer w0.25: J?.4@119.969,81.097 v1(133.448,81.097) ; v1(141.944,81.097) 142.41,81.563 IC_Master.18
  Bottom Layer w0.25: v1(133.448,81.097) v1(141.944,81.097)
ANAPIN1: ANA1.2 IC_Master.83 J?.5@119.969,98.153 | length 52.5
  Top Layer w0.25: v1(116.489,98.153) 119.969,98.153 120.604,98.153 v1(122.958,95.799) ; v4(149.824,73.679) 152.656,73.679 IC_Master.83
  Bottom Layer w0.25: ANA1.2 v1(116.489,98.153) ; v1(122.958,95.799) 122.958,89.059 138.338,73.679 v4(149.824,73.679)
ANAPIN2: ANA2.2 IC_Master.84 J?.6@119.969,101.153 | length 54.8
  Top Layer w0.25: v1(116.463,101.153) 119.969,101.153 120.604,101.153 v1(123.5,98.257) ; v1(150.55,74.175) 150.555,74.18 152.655,74.18 IC_Master.84
  Bottom Layer w0.25: ANA2.2 v1(116.463,101.153) ; v1(123.5,98.257) 123.5,89.424 138.749,74.175 v1(150.55,74.175)
AR_MISO: CON_FTDI_MCP.4 IC_LTC.3 IC_Master.22 R_MISO.1 | length 94
  Top Layer w0.25: v1(143.097,76.689) 140.41,79.376 IC_Master.22 140.41,87.485 141.74,88.815 160.845,88.815 165.767,93.737 IC_LTC.3 ; v1(177.764,69.459) CON_FTDI_MCP.4
  Bottom Layer w0.25: v1(143.097,76.689) 170.534,76.689 v1(177.764,69.459) R_MISO.1
AR_MOSI: CON_FTDI_MCP.5 IC_LTC.2 IC_Master.21 | length 81.5
  Top Layer w0.25: v1(143.699,77.256) 140.91,80.045 IC_Master.21 140.91,86.935 142.275,88.3 v1(151.528,88.3) ; v1(160.568,89.451) 165.267,94.15 IC_LTC.2 ; v1(177.908,72.459) CON_FTDI_MCP.5
  Bottom Layer w0.25: v1(143.699,77.256) 173.111,77.256 v1(177.908,72.459) ; v1(151.528,88.3) 159.417,88.3 v1(160.568,89.451)
AR_RESET: C_RST2.1 C_RST.1 IC_Master.30 R_RST.1 RST_SWITCH.3 RST_SWITCH.4 | length 56.6
  Top Layer w0.25: v1(135.783,85.92) 134.496,84.633 134.496,81.522 135.834,80.184 IC_Master.30
  Bottom Layer w0.25: v1(135.783,85.92) 141.843,91.98 141.843,101.79 146.633,106.58 RST_SWITCH.3 RST_SWITCH.4 C_RST2.1 158.989,102.191 R_RST.1 155.739,102.19 C_RST.1 C_RST.1@152.491,102.191
AR_RXD0/TXUART: CON_FTDI_MCP.8 IC_Master.2 | length 58.4
  Top Layer w0.25: IC_Master.2 150.41,85.235 151.175,86 179.545,86 184.24,81.305 184.24,69.66 190.441,63.459 CON_FTDI_MCP.8
AR_SCK: CON_FTDI_MCP.6 IC_LTC.4 IC_Master.20 | length 80.3
  Top Layer w0.25: v1(143.581,78.336) 141.41,80.507 IC_Master.20 141.41,86.335 142.8,87.725 160.955,87.725 166.267,93.037 IC_LTC.4 ; v1(177.985,75.459) CON_FTDI_MCP.6
  Bottom Layer w0.25: v1(143.581,78.336) 175.108,78.336 v1(177.985,75.459)
AR_SS: IC_LTC.5 IC_Master.19 R_SS.1 | length 56.3
  Top Layer w0.25: IC_Master.19 141.91,85.785 143.15,87.025 161.428,87.025 166.767,92.364 IC_LTC.5 166.767,98.783 167.701,99.717 175.983,99.717 178.013,101.747 178.013,106.304 175.75,108.567 R_SS.1
AR_TXD0/RXUART: CON_FTDI_MCP.9 IC_Master.3 | length 57.1
  Top Layer w0.25: IC_Master.3 149.91,85.51 150.925,86.525 179.914,86.525 184.906,81.533 184.906,71.994 190.441,66.459 CON_FTDI_MCP.9
AREF: C_AREF.2 IC_Master.98 | length 9.3
  Top Layer w0.25: IC_Master.98 v1@158.58,81.184
  Bottom Layer w0.25: v1(158.58,81.191) 161.987,81.191 C_AREF.2
BLINK_LED: IC_Master.26 RLED.1 | length 33.2
  Top Layer w0.25: IC_Master.26 v1(139.327,82.184) ; v1(167.43,82.184) RLED.1
  Bottom Layer w0.25: v1(139.327,82.184) v1(167.43,82.184)
CANH: CONN_CAN.3 CONN_CAN.6 | length 9.4
  Top Layer w0.25: CONN_CAN.6@181.676,101.234 CONN_CAN.3@191.076,101.234
CANL: CONN_CAN.2 CONN_CAN.5 | length 9.4
  Top Layer w0.25: CONN_CAN.5@181.676,104.234 CONN_CAN.2@191.076,104.234
"CHRG AUX": CON_FTDI_MCP.12 IC_Master.72 R_AUX+.1 | length 84.8
  Top Layer w0.25: v1(149.41,61.92) IC_Master.72 ; CON_FTDI_MCP.12 v1(191.076,80.542)
  Bottom Layer w0.25: v1(149.41,61.92) 157.897,53.433 182.952,53.433 191.076,61.557 v1(191.076,80.542) R_AUX+.1
CSOUT: CON_CS.2 IC_Master.82 | length 58.5
  Top Layer w0.25: CON_CS.2 158.552,60.459 160.136,62.043 160.136,71.637 158.589,73.184 IC_Master.82
DIGIPIN1: DIG1.2 IC_Master.24 J?.8 | length 42.8
  Top Layer w0.25: v1(116.484,107.153) J?.8 120.604,107.153 127.948,99.809 137.243,99.809 139.41,97.642 IC_Master.24
  Bottom Layer w0.25: DIG1.2 v1(116.484,107.153)
DIGIPIN2: DIG2.2 IC_Master.25 J?.7 | length 40.9
  Top Layer w0.25: v1(116.553,104.153) J?.7 120.604,104.153 125.46,99.297 136.928,99.297 138.91,97.315 IC_Master.25
  Bottom Layer w0.25: DIG2.2 v1(116.553,104.153)
FTDI_DTR: C_RST2.2 CON_FTDI_MCP.10 | length 52.7
  Top Layer w0.25: v1(167.927,91.403) 181.807,91.403 187.968,85.242 187.968,71.932 190.441,69.459 CON_FTDI_MCP.10
  Bottom Layer w0.25: C_RST2.2 v1(167.927,91.403)
GND: ANA1.1 ANA2.1 C1.1 C2.1 C3.1 C4.1 C5.1 C_AREF.1 C_LDO1.2 C_LDO2.1 C_RST.2 C_tr1.2 C_tr2.2 C_XTAL1.1 C_XTAL2.2 Clt1.2 Clt2.2 CON_CS.4 CON_FTDI_MCP.2 CON_FTDI_MCP.11 CONN_CAN.4 DIG1.1 DIG2.1 IC_LTC.1 IC_LTC.13 IC_LTC.14 IC_Master.11 IC_Master.32 IC_Master.62 IC_Master.81 IC_Master.99 J?.2@110.569,81.097 J?.3@110.569,104.153 J?.4@110.569,107.153 LDO.3 LED_BLINK.1 POW_LED.1 R_IBIAS2.1 R_LDO2.1 RST_SWITCH.1 RST_SWITCH.2
  other v1: 176.272,111.77
  other v2: 109.032,50.372 192.506,50.372 109.032,117.098 192.506,117.098
IBIAS: IC_LTC.16 R_IBIAS1.1 | length 4.3
  Top Layer w0.25: R_IBIAS1.1 163.367,103.939 164.767,102.538 IC_LTC.16
ICMP: IC_LTC.15 R_IBIAS1.2 R_IBIAS2.2 | length 6.8
  Top Layer w0.25: IC_LTC.15 R_IBIAS1.2 R_IBIAS2.2
IM: IC_LTC.10 R_IPIM.2 Transformer.4 | length 35.9
  Top Layer w0.25: Transformer.4 153.877,90.297 162.707,99.127 166.517,99.127 167.767,100.377 IC_LTC.10 167.767,105.784 170.55,108.567 R_IPIM.2 ; R_IPIM.2@170.752,108.567 R_IPIM.2@170.752,108.792
IM_CON: CON_ISOSPI.2 Transformer.3 | length 18.4
  Top Layer w0.25: Transformer.3 131.974,90.297 136.4,94.723 v1(136.4,98.075) ; CON_ISOSPI.2 136.4,101.983 v1(136.4,104.225)
  Bottom Layer w0.25: v1(136.4,98.075) v1(136.4,104.225)
IP: IC_LTC.11 R_IPIM.1 Transformer.6 | length 32.7
  Top Layer w0.25: Transformer.6 158.032,95.377 162.4,99.745 166.522,99.745 167.267,100.49 IC_LTC.11 167.267,107.184 168.65,108.567 R_IPIM.1 ; R_IPIM.1@168.852,108.567 R_IPIM.1@168.852,108.792
IP_CON: CON_ISOSPI.1 Transformer.1 | length 18.3
  Top Layer w0.25: Transformer.1 131.974,95.377 134.672,98.075 v1(134.675,98.075) ; CON_ISOSPI.1 136.4,111.379 v1(136.4,108.675)
  Bottom Layer w0.25: v1(134.675,98.075) 134.675,106.95 v1(136.4,108.675)
LVMS: F?.2@129.135,63.876 J?.1@110.569,78.097 | length 27.2
  Top Layer w0.6: J?.1@110.569,78.097 110.569,73.809 114.087,70.291 123.045,70.291 129.135,64.201 F?.2@129.135,63.876
MCP_SS: CON_FTDI_MCP.3 IC_Master.23 | length 51.9
  Top Layer w0.25: IC_Master.23 139.91,78.948 v1@143.131,75.727 ; v1(177.774,66.459) CON_FTDI_MCP.3
  Bottom Layer w0.25: v1(143.145,75.727) 168.506,75.727 v1(177.774,66.459)
NetC_tr1_1: C_tr1.1 Transformer.2 | length 5.4
  Top Layer w0.25: v1(128.806,92.837) Transformer.2
  Bottom Layer w0.25: C_tr1.1 126.172,92.837 v1(128.806,92.837)
NetC_tr2_1: C_tr2.1 Transformer.5 | length 5.4
  Top Layer w0.25: Transformer.5 v1(148.488,92.837)
  Bottom Layer w0.25: v1(148.488,92.837) 151.195,92.837 C_tr2.1
NetC_XTAL1_2: C_XTAL1.2 R_XTAL2.1 Y?.1 | length 12
  Bottom Layer w0.25: C_XTAL1.2 120.28,70.875 R_XTAL2.1 128.138,70.875 Y?.1
NetLDO_5: LDO.5 R_LDO1.1 R_LDO2.2 | length 8.9
  Top Layer w0.25: R_LDO1.1 R_LDO2.2 162.097,63.876 LDO.5
NetLED_BLINK_2: LED_BLINK.2 RLED.2 | length 5.1
  Top Layer w0.25: RLED.2 LED_BLINK.2
NetPOW_LED_2: POW_LED.2 R_POW_LED.2 | length 5.1
  Top Layer w0.25: R_POW_LED.2 POW_LED.2
XTAL1: IC_Master.34 R_XTAL2.2 R_XTAL.2 | length 16.5
  Top Layer w0.25: v1(128.112,76.75) 133.275,76.75 134.709,78.184 IC_Master.34
  Bottom Layer w0.25: R_XTAL2.2 R_XTAL.2 v1(128.112,76.75)
XTAL2: C_XTAL2.1 IC_Master.33 R_XTAL.1 Y?.2 | length 16.9
  Top Layer w0.25: Y?.2@131.064,78.686 137.158,78.686 IC_Master.33
  Bottom Layer w0.25: C_XTAL2.1 R_XTAL.1 125.231,78.681 Y?.2
pads on no net: CON_CS.1 CON_CS.5 CON_CS.6 CON_FTDI_MCP.13 CON_FTDI_MCP.14 CON_ISOSPI.3 CON_ISOSPI.4 CONN_CAN.7 CONN_CAN.8 IC_Master.1 IC_Master.4 IC_Master.5 IC_Master.6 IC_Master.7 IC_Master.8 IC_Master.9 IC_Master.12 IC_Master.13 IC_Master.14 IC_Master.15 IC_Master.16 IC_Master.17 IC_Master.27 IC_Master.28 IC_Master.29 IC_Master.35 IC_Master.36 IC_Master.37 IC_Master.38 IC_Master.39 IC_Master.40 IC_Master.41 IC_Master.42 IC_Master.43 IC_Master.44 IC_Master.45 IC_Master.46 IC_Master.47 IC_Master.48 IC_Master.49 IC_Master.50 IC_Master.51 IC_Master.52 IC_Master.53 IC_Master.54 IC_Master.55 IC_Master.56 IC_Master.57 IC_Master.58 IC_Master.59 IC_Master.60 IC_Master.63 IC_Master.64 IC_Master.65 IC_Master.66 IC_Master.67 IC_Master.68 IC_Master.69 IC_Master.70 IC_Master.71 IC_Master.73 IC_Master.74 IC_Master.75 IC_Master.76 IC_Master.77 IC_Master.78 IC_Master.79 IC_Master.85 IC_Master.86 IC_Master.87 IC_Master.88 IC_Master.89 IC_Master.90 IC_Master.91 IC_Master.92 IC_Master.93 IC_Master.94 IC_Master.95 IC_Master.96 IC_Master.97 J?.3@119.969,78.097 J?.5@115.269,74.212 J?.6@115.269,84.982 J?.9 J?.10

## Polygon pours and split planes (outlines as drawn)
GND on Bottom Layer "GND_L02_P000" (solid, pour order 0): 105.333,120.459 196.228,120.459 196.228,46.909 105.333,46.909
GND on Top Layer "GND_L01_P001" (solid, pour order 1): 105.334,120.435 196.221,120.435 196.221,46.909 105.334,46.909

## Silkscreen, mask and mechanical layers (free items; w line width, h text height)
Top Overlay:
  text "ISOSPI" at 132.525,114.774 h1.52
  text "IP" at 137.529,111.179 h0.6
  text "CAN" at 182.408,109.541 h1.52 r90
  text "SPARE" at 120.835,109.477 h1.52 r90
  text "GND" at 178.166,106.979 h0.6
  text "12V" at 192.841,106.979 h0.6
  text "DIG" at 122.589,104.864 h0.6 r90
  text "GND" at 108.421,104.801 h0.6 r90
  text "CANL" at 192.866,103.954 h0.6
  text "CANL" at 177.5,103.837 h0.6
  text "IM" at 137.529,101.579 h0.6
  text "NOTCH THIS SIDE" at 139.17,101.576 h0.6
  text "CANH" at 177.484,100.89 h0.6
  text "CANH" at 192.866,100.879 h0.6
  text "5V" at 108.491,99.088 h0.6 r90
  text "ANA" at 122.469,98.837 h0.6 r90
  text "AF" at 122.055,80.799 h0.6
  text "GND" at 106.782,80.719 h0.6
  text "MCP" at 182.403,77.857 h1.52 r90
  text "LVMS" at 106.196,77.824 h0.6
  text "5V" at 160.402,76.083 h0.6 r90
  text "CAUX" at 193.06,75.16 h0.6
  text "SCK" at 177.936,75.078 h0.6
  text "GND" at 193.06,72.19 h0.6
  text "MOSI" at 177.546,72.132 h0.6
  text "DTR" at 193.081,69.179 h0.6
  text "MISO" at 177.455,69.096 h0.6
  text "SS" at 179.502,66.694 h0.6 r180
  text "TX" at 193.06,66.103 h0.6
  text "12V" at 129.936,65.412 h0.6
  text "5V" at 107.569,63.164 h0.6
  text "RX" at 193.111,63.113 h0.6
  text "GND" at 177.966,63.092 h0.6
  text "5V" at 193.111,60.215 h0.6
  text "CS" at 122.055,60.162 h0.6
  text "5V" at 178.515,60.154 h0.6
  text "GND" at 106.988,60.035 h0.6
  text "CS" at 120.736,55.608 h1.52 r90
  text "FTDI" at 191.9,53.097 h1.52 r90
  text "BMS MASTER 22-23" at 139.281,48.637 h1.52